# Altium PCB DL-5新款球锁-20201230.PcbDoc (part 2 of 2)
Units mm, origin at the board's own origin, x right, y up, seen from the top; angles counter-clockwise.
Board outline 55.99 x 50 mm, 4 copper layers (Top Layer, POWER, GND, Bottom Layer); 97 components, 70 nets, 304 pads, 134 vias.
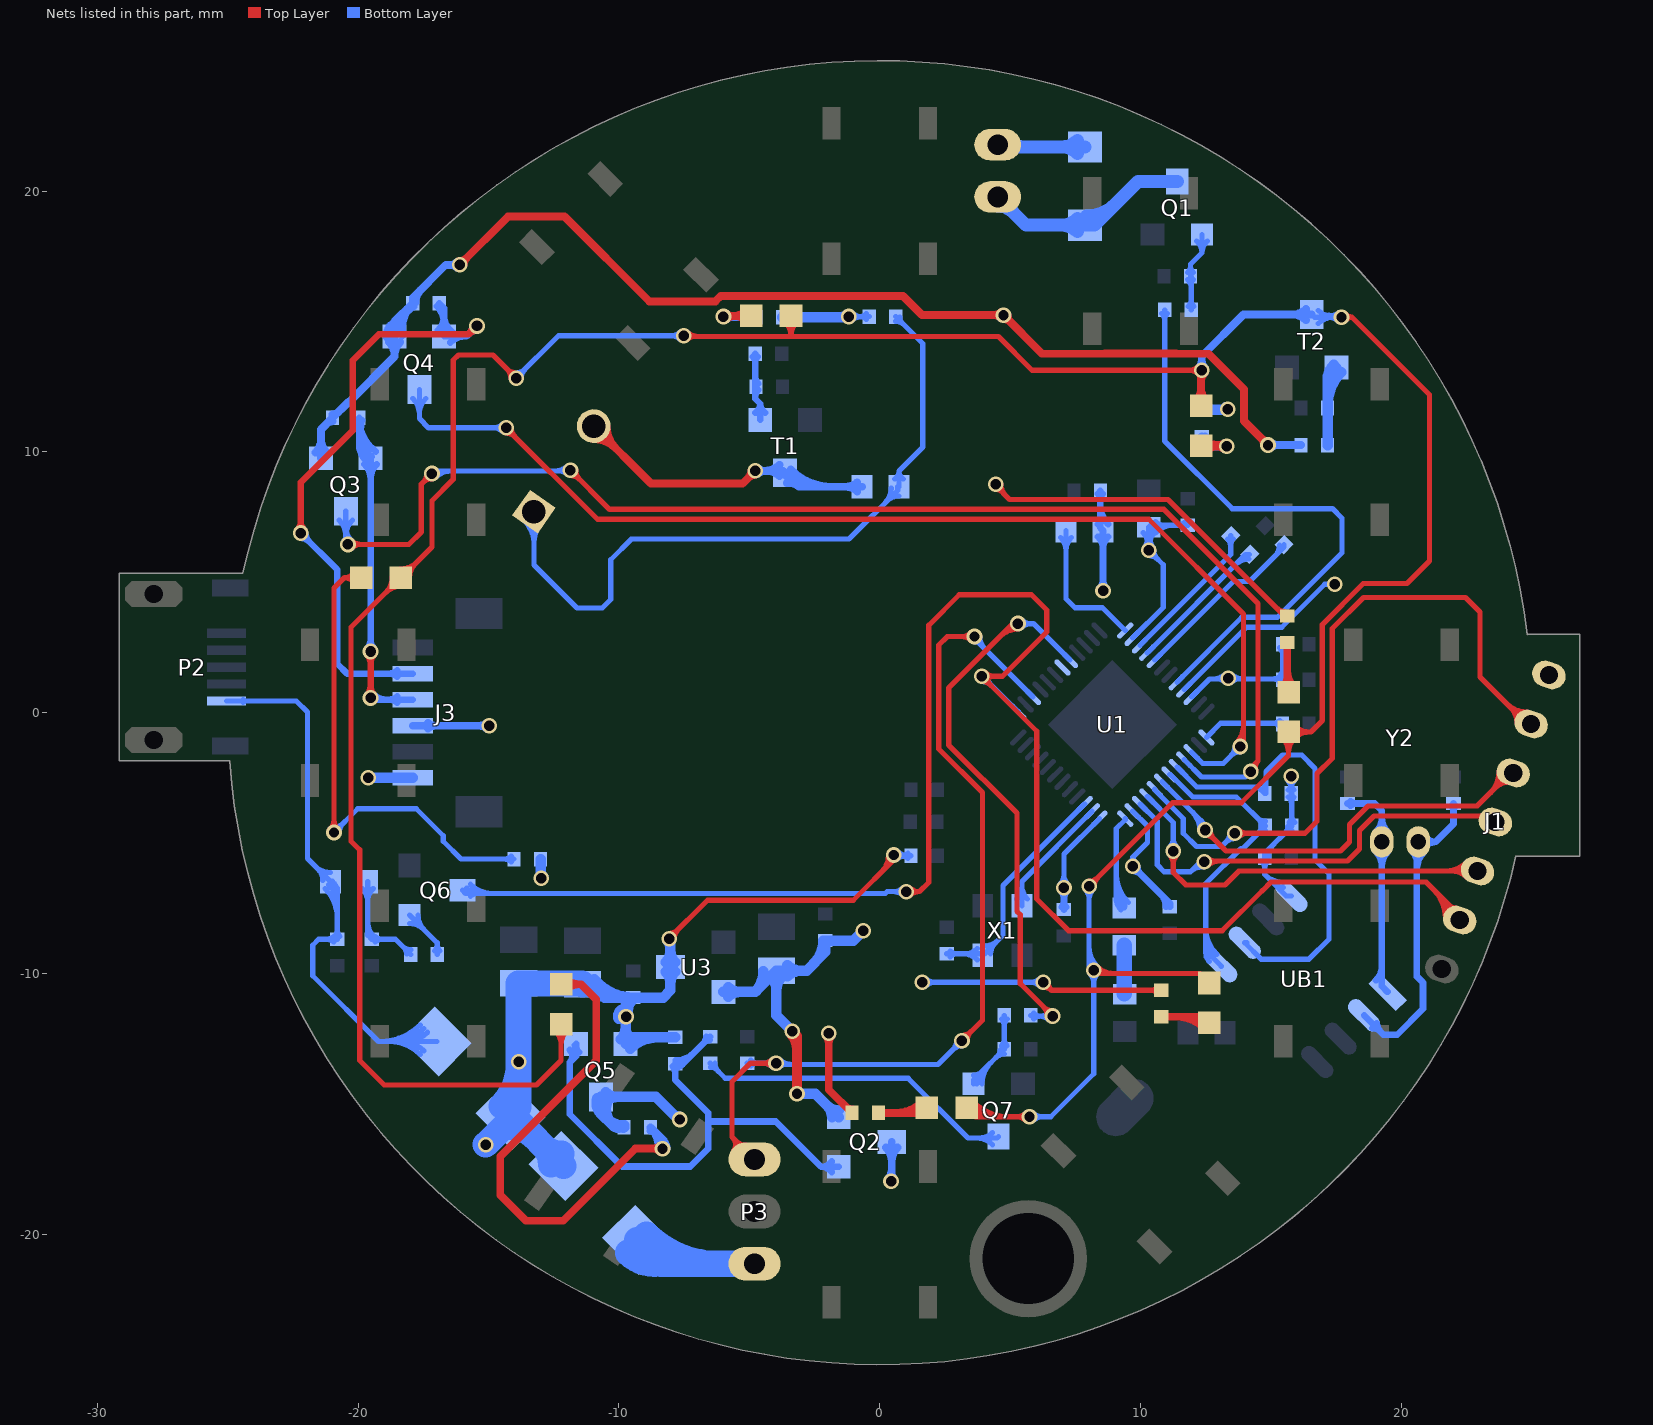
[diagram p4: the nets of this part, all layers, seen from the top]

## Via types
v1: diameter 0.6, hole 0.4, Top Layer to Bottom Layer, 110 vias
v2: diameter 0.6, hole 0.4, Top Layer to Bottom Layer, tented both sides, 12 vias
v3: diameter 0.61, hole 0.406, Top Layer to Bottom Layer, 6 vias
v4: diameter 0.61, hole 0.4, Top Layer to Bottom Layer, 4 vias
v5: diameter 0.61, hole 0.406, Top Layer to Bottom Layer, tented both sides, 2 vias

## Nets (pads, with @x,y where several pads share a name; then routed paths per layer and width w, separated by ;. In a path a pad name is that pad's centre, name@x,y a point inside that pad or via, vN(x,y) a via of type N, cw(c..) or ccw(c..) an arc to the next point about the centre after c; other vN are vias at no path point) (continued)
M3V3: C4.1 C5.1 C39.1 C41.1 C42.1 J1.1 J3.1 Q2.S R5.2 R8.2 U1.26 U3.2 UB1.8 | length 46.4
  Top Layer w0.4: v2@-3.424,-12.288 cw(c-4.023,-12.888) -3.175,-12.888 ; v2(-3.353,-12.217) -3.175,-12.395 v2(-3.175,-14.605)
  Bottom Layer w0.2: J3.1@-18.015,-2.515 J3.1@-18,-2.5 ; U1.26@9.693,2.866 10.866,4.039 10.866,5.67 v1(10.312,6.223) C41.1@10.312,7.112 10.389,7.188 C42.1@11.811,7.188 ; C41.1@10.1,6.9 cw(c9.588,6.388) 10.312,6.388 cw(c11.037,6.388) C41.1@10.525,6.9 ; v1@10.161,6.353 ccw(c9.889,6.586) 10.234,6.679 ; v1@10.171,6.364 ccw(c9.83,6.706) 10.312,6.706 ccw(c10.795,6.706) v1@10.454,6.364 ; v1@10.212,6.396 ccw(c10.044,6.688) 10.37,6.601 ; 10.255,6.601 ccw(c10.581,6.688) v1@10.412,6.396 ; v1@10.312,6.023 cw(c10.312,5.54) 10.654,5.882 cw(c10.995,6.223) v1@10.512,6.223 ; 10.39,6.679 ccw(c10.736,6.586) v1@10.464,6.353 ; C41.1@10.433,7.041 cw(c10.788,6.687) 10.788,7.188 ; C41.1@10.575,6.9 cw(c11.271,6.204) 11.271,7.188 ; C41.1@10.575,7.324 ccw(c10.903,7.652) 10.903,7.188 ; C42.1@11.677,7.079 ccw(c11.414,6.816) 11.414,7.188 ccw(c11.414,7.56) C42.1@11.677,7.297 ; C39.1@14.649,-5.697 cw(c14.386,-5.96) 14.757,-5.96 cw(c15.129,-5.96) C39.1@14.866,-5.697 ; 14.781,-6.221 ccw(c15.472,-5.53) UB1.8@15.472,-6.507 ; C39.1@14.911,-5.537 cw(c15.651,-5.537) 15.128,-5.014 ; 15.122,-6.562 ccw(c15.472,-6.212) UB1.8@15.472,-6.707 ; 15.493,-4.65 cw(c15.799,-4.956) R8.2@15.799,-4.523 ; R8.2@15.554,-4.588 ccw(c15.334,-4.369) R8.2@15.645,-4.369 ; v1@15.632,-2.58 cw(c15.291,-2.921) 15.773,-2.921 cw(c16.256,-2.921) v1@15.915,-2.58 ; R5.2@15.665,-3.233 cw(c15.34,-3.557) 15.799,-3.557 ; R5.2@15.665,-2.965 ccw(c15.402,-2.702) 15.773,-2.702 ccw(c16.145,-2.702) R5.2@15.882,-2.965 ; v1@15.673,-2.612 cw(c15.548,-2.828) 15.79,-2.764 ; v1@15.684,-2.617 cw(c15.623,-2.738) 15.754,-2.774 ; R8.2@15.69,-4.209 ccw(c15.427,-3.946) 15.799,-3.946 ccw(c16.171,-3.946) R8.2@15.908,-4.209 ; 15.757,-2.764 cw(c15.999,-2.828) v1@15.873,-2.612 ; v1(15.773,-2.438) R5.2@15.773,-3.099 15.799,-3.124 R8.2@15.799,-4.343 14.757,-5.385 C39.1@14.757,-5.563 14.757,-6.198 15.585,-7.025 UB1.8@15.79,-7.025 ; 15.793,-2.774 cw(c15.924,-2.738) v1@15.863,-2.617 ; 15.799,-3.435 cw(c16.084,-3.435) R5.2@15.882,-3.233
  Bottom Layer w0.4: v2(-19.609,-2.5) J3.1@-17.899,-2.5 ; U3.2@-5.994,-10.704 -4.774,-10.704 ; U3.2@-5.813,-10.885 cw(c-5.373,-11.325) -5.373,-10.704 cw(c-5.373,-10.083) U3.2@-5.813,-10.522 ; C4.1@-4.473,-9.91 cw(c-5.505,-9.972) -4.774,-10.704 ; C4.1@-4.18,-10.11 cw(c-4.706,-10.636) -3.962,-10.636 cw(c-3.219,-10.636) C4.1@-3.745,-10.11 ; C4.1@-3.541,-10.11 cw(c-3.016,-10.636) -3.016,-9.892 cw(c-3.016,-9.148) C4.1@-3.541,-9.674 ; v2(-3.353,-12.217) -3.962,-11.608 C4.1@-3.962,-9.892 ; v2(-3.175,-14.605) -2.479,-14.605 Q2.S@-1.575,-15.509 ; -2.524,-9.61 ccw(c-3.396,-8.738) C5.1@-2.162,-8.738 ; Q2.S@-1.832,-15.509 ccw(c-2.453,-15.509) -2.014,-15.07 ccw(c-1.575,-14.631) Q2.S@-1.575,-15.252 ; v1(-0.635,-8.357) -1.016,-8.738 C5.1@-2.083,-8.738 -2.083,-9.169 -2.805,-9.892 C4.1@-3.962,-9.892 ; -4.774,-10.704 C4.1@-3.962,-9.892
NetBZ1_1: BZ1.1 C7.2 R47.1 | length 32.4
  Bottom Layer w0.2: BZ1.1@-13.617,7.355 cw(c-14.47,6.502) -13.263,6.502 cw(c-12.056,6.502) BZ1.1@-12.909,7.355 ; BZ1.1@-13.475,7.497 cw(c-13.987,6.985) -13.263,6.985 cw(c-12.539,6.985) BZ1.1@-13.051,7.497 ; BZ1.1@-13.263,7.709 -13.263,5.668 -11.608,4.013 -10.643,4.013 -10.312,4.343 -10.312,5.867 -9.525,6.655 -1.185,6.655 0.686,8.526 C7.2@0.686,8.661 ; 0.2,8.039 ccw(c-0.372,8.611) C7.2@0.437,8.611 ; 0.284,8.124 cw(c0.737,7.672) C7.2@0.737,8.311 ; C7.2@0.571,8.961 ccw(c0.365,9.271) 0.737,9.271 ; R47.1@0.61,15.01 cw(c0.61,14.577) 0.916,14.883 ; R47.1@0.61,15.189 1.651,14.148 1.651,10.185 0.737,9.271 ; C7.2@0.737,8.661 0.737,9.271 ; R47.1@0.764,15.164 ccw(c1.074,15.164) R47.1@0.855,14.944 ; C7.2@0.903,8.961 cw(c1.108,9.271) 0.737,9.271
NetBZ1_2: BZ1.2 C7.1 T1.3 | length 20.7
  Top Layer w0.3: BZ1.2@-10.969,10.486 cw(c-10.969,9.278) -10.115,10.132 cw(c-9.262,10.986) BZ1.2@-10.469,10.986 ; BZ1.2@-10.969,10.986 -8.772,8.788 -5.258,8.788 v1(-4.775,9.271) ; v1@-4.925,9.271 cw(c-5.287,9.271) -5.031,9.015 cw(c-4.775,8.759) v1@-4.775,9.121
  Bottom Layer w0.3: v1(-4.775,9.271) -3.708,9.271 T1.3@-3.632,9.195 -3.099,8.661 ; v1@-4.669,9.165 cw(c-4.413,8.909) -4.413,9.271 cw(c-4.413,9.633) v1@-4.669,9.377 ; -4.414,9.271 ccw(c-4.414,10.069) T1.3@-3.849,9.505 ; -4.334,9.271 cw(c-4.334,8.586) T1.3@-3.849,9.07 ; T1.3@-3.627,9.107 ccw(c-2.551,10.183) -2.551,8.661 ; T1.3@-3.569,8.801 cw(c-3.463,8.297) -3.099,8.661 ; T1.3@-3.415,9.319 ccw(c-1.827,10.907) -1.827,8.661 ; T1.3@-3.325,9.102 ccw(c-2.807,9.102) -3.173,8.736 ; C7.1@-0.863,8.485 ccw(c-1.289,8.058) -1.289,8.661 ccw(c-1.289,9.265) C7.1@-0.863,8.838 ; C7.1@-0.686,8.661 -3.099,8.661
NetC1_1: C1.1 U1.37 | length 3.7
  Bottom Layer w0.2: U1.37@12.522,-0.952 13.067,-0.406 C1.1@15.443,-0.406 ; C1.1@15.334,-0.515 ccw(c15.071,-0.778) 15.071,-0.406 ccw(c15.071,-0.035) C1.1@15.334,-0.298
NetC20_2: C20.2 RW2.2 RW3.2 | length 7
  Bottom Layer w0.2: C20.2@-19.846,-6.739 cw(c-20.358,-7.251) -19.634,-7.251 cw(c-18.91,-7.251) C20.2@-19.422,-6.739 ; -19.634,-8.008 ccw(c-18.829,-8.008) RW2.2@-19.398,-8.578 ; C20.2@-19.634,-6.477 -19.634,-8.534 RW2.2@-19.482,-8.687 -18.567,-8.687 RW3.2@-17.983,-9.271 ; RW2.2@-19.348,-8.796 cw(c-19.085,-9.059) -19.085,-8.687 cw(c-19.085,-8.315) RW2.2@-19.348,-8.578 ; -18.289,-8.965 ccw(c-17.983,-8.658) RW3.2@-17.983,-9.092 ; RW3.2@-18.228,-9.026 cw(c-18.448,-9.246) RW3.2@-18.137,-9.246
NetC30_1: C30.1 L2.1 | length 1.9
  Bottom Layer w0.6: C30.1@9.373,-10.77 L2.1@9.373,-8.915
NetC34_1: C34.1 U1.29 | length 7.3
  Bottom Layer w0.2: U1.29@10.542,2.018 13.553,5.029 14.173,5.029 15.498,6.354 C34.1@15.498,6.448 ; 15.15,6.006 ccw(c14.726,6.43) C34.1@15.326,6.43
NetC37_1: C37.1 U1.28 | length 6.1
  Bottom Layer w0.2: U1.28@10.259,2.301 14.025,6.067 C37.1@14.177,6.067 ; 13.637,5.679 cw(c14.159,5.158) C37.1@14.159,5.895
NetC37_2: C37.2 U1.27 | length 6.2
  Bottom Layer w0.2: U1.27@9.976,2.583 13.458,6.066 C37.2@13.458,6.785 ; C37.2@13.332,6.659 cw(c13.025,6.352) 13.458,6.352 ; C37.2@13.458,6.439 cw(c13.769,6.439) C37.2@13.549,6.659
NetC38_2: C38.2 U1.3 X1.3 | length 11.6
  Bottom Layer w0.2: C38.2@2.565,-9.246 4.01,-9.246 4.724,-8.531 4.724,-6.628 U1.3@7.855,-3.498 ; C38.2@2.7,-9.354 cw(c2.963,-9.617) 2.963,-9.246 cw(c2.963,-8.874) C38.2@2.7,-9.137 ; 3.198,-9.246 cw(c3.198,-10.007) X1.3@3.737,-9.469 ; 3.251,-9.246 ccw(c3.251,-8.559) X1.3@3.737,-9.044 ; X1.3@3.949,-8.957 ccw(c3.949,-8.112) 4.546,-8.709 ; X1.3@4.249,-9.257 cw(c4.853,-9.257) 4.426,-8.83
NetC43_1: C43.1 UB1.1 Y2.2 | length 12
  Bottom Layer w0.254: C43.1@17.932,-3.48 18.974,-3.48 19.25,-3.756 Y2.2@19.25,-4.953 19.25,-10.485 UB1.1@19.467,-10.702 ; C43.1@18.048,-3.57 cw(c18.264,-3.786) 18.264,-3.48 cw(c18.264,-3.173) C43.1@18.048,-3.39 ; Y2.2@19.022,-5.331 cw(c18.47,-5.883) 19.25,-5.883 cw(c20.03,-5.883) Y2.2@19.479,-5.331 ; Y2.2@19.022,-4.575 ccw(c18.47,-4.023) 19.25,-4.023 ccw(c20.03,-4.023) Y2.2@19.479,-4.575 ; UB1.1@19.026,-10.262 ccw(c18.486,-9.721) 19.25,-9.721
NetC45_2: C45.2 UB1.2 Y2.1 | length 15.2
  Bottom Layer w0.254: UB1.2@18.569,-11.6 19.313,-12.344 19.837,-12.344 20.828,-11.354 20.828,-10.35 20.593,-10.115 20.593,-5.01 Y2.1@20.65,-4.953 21.311,-4.953 ; UB1.2@18.887,-12.091 cw(c18.887,-12.509) 19.182,-12.214 cw(c19.478,-11.918) UB1.2@19.06,-11.918 ; Y2.1@20.422,-5.331 cw(c20.008,-5.745) 20.593,-5.745 ; 20.593,-6.02 cw(c21.567,-6.02) Y2.1@20.879,-5.331 ; Y2.1@20.905,-5.151 cw(c21.311,-5.467) 21.311,-4.953 ; Y2.1@20.905,-4.755 ccw(c21.311,-4.439) 21.311,-4.953 ; C45.2@21.907,-3.57 cw(c21.69,-3.786) 21.996,-3.786 cw(c22.303,-3.786) C45.2@22.086,-3.57 ; C45.2@21.996,-3.48 21.996,-4.267 21.311,-4.953
NetD1_1: D1.1 P3.1 | length 9
  Bottom Layer w1: D1.1@-9.658,-20.705 ccw(c-8.642,-19.689) -8.642,-21.126 ; D1.1@-9.305,-20.21 -8.389,-21.126 P3.1@-4.801,-21.126 ; D1.1@-8.951,-19.998 ccw(c-6.228,-17.275) -6.228,-21.126
NetD3_1: D3.1 P1.1 Q1.C | length 11.9
  Bottom Layer w0.5: P1.1@4.521,19.427 cw(c4.521,18.582) 5.119,19.18 cw(c5.716,19.777) P1.1@4.871,19.777 ; P1.1@4.521,19.777 5.605,18.693 D3.1@7.874,18.693 8.228,18.693 9.906,20.371 Q1.C@11.405,20.371 ; D3.1@7.577,18.446 ccw(c6.979,17.848) 6.979,18.693 ccw(c6.979,19.538) D3.1@7.577,18.94 ; D3.1@7.924,19.043 ccw(c7.924,20.622) 9.041,19.506
NetL2_2: L2.2 U1.48 | length 6.3
  Bottom Layer w0.2: L2.2@9.068,-7.119 ccw(c9.696,-7.119) L2.2@9.252,-7.564 ; 9.068,-6.636 ccw(c10.179,-6.636) L2.2@9.393,-7.422 ; 9.068,-6.154 ccw(c10.662,-6.154) L2.2@9.535,-7.281 ; L2.2@9.373,-7.493 9.068,-7.188 9.068,-4.445 9.41,-4.102 U1.48@9.41,-4.063
NetL3_1: L3.1 U1.25 | length 6.5
  Bottom Layer w0.2: L3.1@6.925,6.723 cw(c6.413,6.211) 7.137,6.211 cw(c7.862,6.211) L3.1@7.35,6.723 ; L3.1@7.137,6.985 7.137,4.369 7.481,4.025 8.534,4.025 U1.25@9.41,3.149
NetLED2_1: LED2.1 R12.2 | length 5
  Top Layer w0.3: LED2.1@12.319,10.236 12.344,10.211 v1(13.31,10.211) ; LED2.1@12.518,10.037 cw(c12.938,9.617) 12.938,10.211 ; LED2.1@12.518,10.435 ccw(c13.061,10.978) v1@13.061,10.211 ; 12.793,10.283 ccw(c12.944,10.845) v1@13.235,10.341 ; v1@13.204,10.105 ccw(c12.947,9.849) 12.947,10.211 ccw(c12.947,10.573) v1@13.204,10.317
  Bottom Layer w0.3: R12.2@12.344,10.592 12.725,10.211 v1(13.31,10.211) ; R12.2@12.474,10.592 ccw(c12.786,10.592) R12.2@12.565,10.371 ; v1@13.204,10.105 ccw(c12.947,9.849) 12.947,10.211 ccw(c12.947,10.573) v1@13.204,10.317
NetLED2_2: LED2.2 LED3.2 LED4.2 LED6.2 LED7.2 LED8.2 LED9.2 T2.3 | length 155.2
  Top Layer w0.2: LED7.2@-18.696,5.182 cw(c-19.497,5.182) -18.931,4.615 cw(c-18.364,4.049) LED7.2@-18.364,4.85 ; LED7.2@-18.364,5.513 ccw(c-18.364,6.376) -17.754,5.766 ; LED7.2@-18.032,5.182 cw(c-17.293,5.182) -17.816,5.705 ; v1@-14.145,12.827 ccw(c-14.627,12.827) -14.286,13.168 ccw(c-13.945,13.51) v1@-13.945,13.027 ; v1(-13.945,12.827) -14.835,13.717 -16.154,13.717 -16.358,13.514 -16.358,8.941 -17.17,8.128 -17.17,6.35 -18.339,5.182 LED7.2@-18.364,5.182 -20.269,3.277 -20.269,-4.928 -19.939,-5.258 -19.939,-13.335 -18.999,-14.275 -13.157,-14.275 -12.217,-13.335 LED6.2@-12.217,-11.938 ; LED6.2@-12.452,-12.173 cw(c-13.018,-12.739) -12.217,-12.739 cw(c-11.416,-12.739) LED6.2@-11.983,-12.173 ; v1(-7.518,14.453) -7.544,14.453 -7.518,14.427 -3.378,14.427 ; v1@-7.377,14.311 cw(c-7.097,14.031) -7.097,14.427 ; v1@-7.377,14.594 ccw(c-6.974,14.997) -6.974,14.427 ; LED8.2@-3.63,14.972 cw(c-4.113,14.453) -3.404,14.453 ; LED8.2@-3.404,15.215 -3.404,14.453 ; LED8.2@-3.178,14.972 ccw(c-2.695,14.453) -3.404,14.453 ; LED9.2@3.279,-15.187 ccw(c4.021,-14.445) 4.021,-15.494 ; LED9.2@3.327,-15.138 3.683,-15.494 v2(5.74,-15.494) ; LED9.2@3.378,-14.834 LED9.2@3.505,-14.961 ; LED9.2@3.421,-15.045 ccw(c4.504,-13.962) 4.504,-15.494 ; LED9.2@3.562,-14.904 ccw(c4.987,-13.479) 4.987,-15.494 ; v2@5.599,-15.635 ccw(c5.258,-15.977) 5.258,-15.494 ccw(c5.258,-15.011) v2@5.599,-15.353 ; v1(8.026,-6.655) 11.227,-3.454 13.857,-3.454 15.672,-1.64 LED3.2@15.672,-0.737 16.535,-0.737 16.968,-0.304 16.968,3.383 18.538,4.953 20.218,4.953 21.082,5.817 21.082,12.192 18.11,15.164 ; v1@8.026,-6.455 ccw(c8.026,-5.972) 8.368,-6.313 ccw(c8.709,-6.655) v1@8.226,-6.655 ; v1@8.346,-9.739 ccw(c8.984,-9.101) 8.984,-10.003 ; 8.501,-10.003 cw(c8.501,-9.584) v1(8.204,-9.881) 8.327,-10.003 12.264,-10.003 LED4.2@12.624,-10.363 ; v1@12.203,12.99 ccw(c11.862,12.649) 11.862,13.132 ccw(c11.862,13.615) v1@12.203,13.273 ; v1(12.344,13.132) 5.842,13.132 4.547,14.427 -3.378,14.427 ; LED3.2@15.437,-0.971 cw(c14.871,-1.538) 15.672,-1.538 cw(c16.473,-1.538) 15.906,-0.971 cw(c16.473,-1.538) 16.473,-0.737 cw(c16.473,0.064) LED3.2@15.906,-0.502 ; v1(17.704,15.164) 18.11,15.164 ; v1@17.862,15.042 cw(c18.11,14.851) 18.11,15.164 ; v1@17.862,15.286 ccw(c18.11,15.477) 18.11,15.164 ; -3.404,14.453 -3.378,14.427
  Top Layer w0.3: LED2.2@12.12,11.959 ccw(c11.639,12.441) 12.319,12.441 ccw(c12.999,12.441) LED2.2@12.518,11.959 ; v1@12.238,13.026 cw(c12.044,12.831) 12.319,12.831 ; LED2.2@12.319,11.76 12.319,13.106 v1(12.344,13.132) ; 12.319,12.708 cw(c12.768,12.708) v1@12.45,13.026
  Bottom Layer w0.2: v1(-13.945,12.827) -12.319,14.453 v1(-7.518,14.453) ; v1@-13.945,13.027 ccw(c-13.945,13.51) -13.603,13.168 ccw(c-13.262,12.827) v1@-13.745,12.827 ; v1@-7.66,14.311 ccw(c-8.001,13.97) -8.001,14.453 ccw(c-8.001,14.935) v1@-7.66,14.594 ; v2(5.74,-15.494) 6.553,-15.494 8.204,-13.843 v1(8.204,-9.881) ; v2@5.882,-15.635 cw(c6.223,-15.977) 6.223,-15.494 cw(c6.223,-15.011) v2@5.882,-15.353 ; v1@7.885,-6.796 cw(c7.544,-7.138) 8.026,-7.138 cw(c8.509,-7.138) v1@8.168,-6.796 ; 8.026,-9.451 ccw(c8.633,-9.451) v1(8.204,-9.881) ; 8.026,-8.969 ccw(c9.116,-8.969) v1@8.346,-9.739 ; v1(8.026,-6.655) 8.026,-9.703 v1(8.204,-9.881) ; v1@8.063,-10.022 cw(c7.721,-10.363) 8.204,-10.363 cw(c8.687,-10.363) v1@8.346,-10.022 ; T2.3@16.561,15.265 16.662,15.164 v1(17.704,15.164) ; T2.3@16.813,14.92 cw(c17.402,14.331) 17.402,15.164 ; T2.3@16.813,15.425 ccw(c17.444,16.056) v1@17.444,15.164 ; 17.111,15.253 ccw(c17.266,15.832) v1@17.594,15.331 ; 17.377,15.182 cw(c17.311,14.937) v1@17.531,15.064 ; v1@17.562,15.022 ccw(c17.221,14.681) 17.221,15.164 ccw(c17.221,15.647) v1@17.562,15.305
  Bottom Layer w0.3: v1@12.238,13.238 ccw(c11.982,13.494) 12.344,13.494 ccw(c12.707,13.494) v1@12.45,13.238 ; v1(12.344,13.132) 12.344,13.665 13.945,15.265 T2.3@16.561,15.265 ; T2.3@16.344,15.048 ccw(c15.819,14.524) 15.819,15.265 ccw(c15.819,16.007) T2.3@16.344,15.483
NetLED3_1: LED3.1 R13.2 | length 3
  Top Layer w0.3: LED3.1@15.473,0.987 ccw(c15.114,1.345) 15.621,1.345 ; 15.621,1.59 ccw(c16.475,1.59) LED3.1@15.871,0.987 ; R13.2@15.621,2.692 15.621,0.838 LED3.1@15.672,0.787
NetLED4_1: LED4.1 R14.2 | length 3.6
  Top Layer w0.3: R14.2@10.795,-11.659 12.395,-11.659 LED4.1@12.624,-11.887 ; 11.392,-11.659 cw(c11.392,-13.119) LED4.1@12.425,-12.086 ; 12.116,-11.659 cw(c12.116,-12.395) LED4.1@12.637,-11.874
NetLED6_1: LED6.1 R15.2 | length 22.2
  Top Layer w0.3: LED6.1@-12.217,-10.414 -11.455,-10.414 -10.871,-10.998 -10.871,-13.335 -14.554,-17.018 -14.554,-18.491 -13.564,-19.482 -12.141,-19.482 -9.373,-16.713 v1(-8.331,-16.713) ; LED6.1@-12.018,-10.613 cw(c-11.537,-11.094) -11.537,-10.414 cw(c-11.537,-9.734) LED6.1@-12.018,-10.215 ; v1@-8.437,-16.819 ccw(c-8.693,-17.075) -8.693,-16.713 ccw(c-8.693,-16.351) v1@-8.437,-16.607
  Bottom Layer w0.3: R15.2@-8.788,-16.03 cw(c-8.788,-16.342) R15.2@-8.568,-16.121 ; v1@-8.481,-16.705 ccw(c-9.534,-16.646) R15.2@-8.788,-15.9 -8.306,-16.383 ; -8.314,-16.375 cw(c-8.635,-16.696) v1@-8.181,-16.722
NetLED7_1: LED7.1 R16.2 | length 21.7
  Top Layer w0.2: v2@-21.067,-4.452 ccw(c-21.408,-4.11) -20.925,-4.11 ccw(c-20.443,-4.11) v2@-20.784,-4.452 ; v2(-20.925,-4.593) -20.925,4.775 -20.519,5.182 ; LED7.1@-20.162,4.994 ccw(c-20.519,4.748) -20.519,5.182 ; LED7.1@-20.162,5.37 cw(c-20.519,5.615) -20.519,5.182 ; LED7.1@-19.888,5.182 -20.519,5.182
  Bottom Layer w0.2: v2(-20.925,-4.593) -20.015,-3.683 -17.773,-3.683 -16.739,-4.717 -16.739,-4.928 -16.053,-5.613 R16.2@-14.021,-5.613 ; v2@-20.925,-4.393 ccw(c-20.925,-3.91) -20.584,-4.252 ccw(c-20.243,-4.593) v2@-20.725,-4.593 ; R16.2@-14.13,-5.722 ccw(c-14.393,-5.985) -14.393,-5.613 ccw(c-14.393,-5.242) R16.2@-14.13,-5.505
NetLED8_1: LED8.1 R17.2 | length 4.5
  Top Layer w0.3: v1(-5.994,15.189) -5.969,15.215 LED8.1@-4.928,15.215 ; v1@-5.888,15.083 cw(c-5.571,14.766) -5.571,15.215 ; v1@-5.888,15.295 ccw(c-5.694,15.49) -5.694,15.215 ; LED8.1@-5.127,15.015 ccw(c-5.608,14.534) -5.608,15.215 ccw(c-5.608,15.895) LED8.1@-5.127,15.414
  Bottom Layer w0.3: v1(-5.994,15.189) -5.969,15.164 R17.2@-4.75,15.164 ; v1@-5.888,15.083 cw(c-5.694,14.888) -5.694,15.164 ; v1@-5.888,15.295 ccw(c-5.571,15.613) -5.571,15.164
NetLED9_1: LED9.1 R20.2 | length 3.7
  Top Layer w0.2: LED9.1@1.753,-14.935 LED9.1@1.854,-14.834
  Top Layer w0.3: R20.2@-0.051,-15.342 1.6,-15.342 LED9.1@1.803,-15.138 ; 0.633,-15.342 ccw(c0.633,-13.968) LED9.1@1.604,-14.939 ; 1.357,-15.342 ccw(c1.357,-14.692) LED9.1@1.816,-15.151
NetQ1_B: Q1.B R1.1 R7.1 | length 5.9
  Bottom Layer w0.2: R1.1@11.804,16.604 cw(c11.48,16.28) 11.938,16.28 ; R1.1@11.804,16.873 ccw(c11.541,17.136) 11.913,17.136 ccw(c12.284,17.136) R1.1@12.022,16.873 ; R7.1@11.829,15.578 ccw(c11.566,15.84) 11.938,15.84 ccw(c12.31,15.84) R7.1@12.047,15.578 ; R7.1@11.938,15.443 11.938,16.713 R1.1@11.913,16.739 11.913,17.196 12.355,17.638 ; 11.938,16.403 cw(c12.223,16.403) R1.1@12.022,16.604 ; Q1.B@12.145,18.091 cw(c11.761,17.638) 12.355,17.638 ; Q1.B@12.355,18.339 12.355,17.638 ; Q1.B@12.565,18.091 ccw(c12.948,17.638) 12.355,17.638
NetQ2_G: Q2.G Q5.G R2.2 R3.1 | length 25.4
  Bottom Layer w0.254: Q5.G@-11.882,-12.928 cw(c-12.131,-13.167) -11.887,-13.411 ; Q5.G@-11.754,-13.011 cw(c-11.809,-13.167) -11.643,-13.167 ; -11.704,-13.228 ccw(c-11.944,-12.988) Q5.G@-11.698,-12.753 ; Q5.G@-11.643,-12.7 -11.643,-13.167 ; Q5.G@-11.533,-13.011 ccw(c-11.478,-13.167) -11.643,-13.167 ; R2.2@-7.938,-13.552 cw(c-8.155,-13.769) -7.849,-13.769 cw(c-7.542,-13.769) R2.2@-7.759,-13.552 ; R2.2@-7.823,-13.589 ccw(c-7.823,-13.221) -7.563,-13.481 ; R2.2@-7.823,-13.335 ccw(c-7.823,-12.354) -7.129,-13.048 ; R2.2@-7.728,-13.546 cw(c-7.544,-13.706) -7.544,-13.462 ; R2.2@-7.728,-13.378 ccw(c-7.544,-13.218) -7.544,-13.462 ; -6.763,-12.681 ccw(c-7.023,-12.421) R3.1@-6.655,-12.421 ; R3.1@-6.701,-12.619 cw(c-6.528,-12.793) R3.1@-6.528,-12.548 ; R3.1@-6.502,-12.421 -7.544,-13.462 ; Q2.G@-1.835,-17.612 ccw(c-2.25,-17.935) -2.25,-17.409 ; Q2.G@-1.835,-17.206 cw(c-2.25,-16.883) -2.25,-17.409 ; Q2.G@-1.575,-17.409 -2.25,-17.409 ; -11.887,-13.411 -11.643,-13.167 ; -11.887,-13.411 -11.887,-15.392 -9.881,-17.399 -7.264,-17.399 -6.579,-16.713 -6.579,-15.672 ; -7.544,-13.462 R2.2@-7.849,-13.462 -7.849,-14.072 -6.579,-15.342 -6.579,-15.672 ; -6.579,-15.672 -3.988,-15.672 -2.25,-17.409
NetQ6_B: Q6.B RW3.1 | length 3.8
  Bottom Layer w0.2: Q6.B@-18.034,-8.082 cw(c-18.034,-8.867) -17.479,-8.312 cw(c-16.924,-7.757) Q6.B@-17.709,-7.757 ; Q6.B@-18.034,-7.757 -16.967,-8.824 RW3.1@-16.967,-9.271 ; RW3.1@-17.076,-9.137 ccw(c-17.339,-8.874) -16.967,-8.874 ccw(c-16.595,-8.874) RW3.1@-16.858,-9.137
NetQ7_B: Q7.B R6.1 R26.1 | length 6.6
  Bottom Layer w0.203: Q7.B@3.597,-14.224 3.597,-14.081 R26.1@4.773,-12.905 4.775,-12.902 R6.1@4.775,-11.608 ; Q7.B@3.597,-13.901 ccw(c3.597,-13.465) 3.904,-13.773 ; Q7.B@3.717,-14.224 cw(c4.353,-14.224) 3.903,-13.774 ; Q7.B@3.92,-14.224 cw(c5.046,-14.224) 4.25,-13.428 ; 4.469,-13.208 cw(c4.773,-13.512) R26.1@4.773,-13.083 ; R26.1@4.53,-13.147 ccw(c4.314,-12.93) R26.1@4.62,-12.93 ; R26.1@4.665,-12.772 ccw(c4.399,-12.505) 4.775,-12.505 ; R6.1@4.667,-11.741 cw(c4.407,-12.001) 4.775,-12.001 cw(c5.143,-12.001) R6.1@4.883,-11.741 ; 4.775,-12.518 ccw(c5.134,-12.518) R26.1@4.88,-12.772
NetQ7_C: Q7.C R3.2 | length 14.1
  Bottom Layer w0.2: R3.2@-6.502,-13.437 -5.922,-14.017 1.088,-14.017 3.378,-16.307 4.496,-16.307 Q7.C@4.547,-16.256 ; R3.2@-6.477,-13.591 cw(c-6.477,-13.901) R3.2@-6.257,-13.682 ; R3.2@-6.323,-13.437 ccw(c-5.89,-13.437) -6.196,-13.743 ; 3.704,-16.307 cw(c3.704,-17.174) Q7.C@4.317,-16.561 ; 3.82,-16.307 ccw(c3.82,-15.605) Q7.C@4.317,-16.101
NetR4_1: R4.1 R11.1 T1.1 | length 4.5
  Bottom Layer w0.254: R11.1@-4.865,13.652 cw(c-5.082,13.435) -4.775,13.435 cw(c-4.469,13.435) R11.1@-4.685,13.652 ; -4.775,12.103 cw(c-4.382,12.103) R4.1@-4.66,12.382 ; -4.775,12.89 ccw(c-4.382,12.89) R4.1@-4.66,12.612 ; R11.1@-4.775,13.767 -4.775,12.497 -4.775,12.04 -4.582,11.847 ; T1.1@-4.766,11.501 ccw(c-4.999,11.847) -4.582,11.847 ; T1.1@-4.582,11.227 -4.582,11.847 ; T1.1@-4.398,11.501 cw(c-4.166,11.847) -4.582,11.847
NetR53_2: R53.2 R54.2 T2.1 | length 5.2
  Bottom Layer w0.4: R53.2@17.17,10.262 R54.2@17.17,11.684 17.17,12.893 T2.1@17.511,13.233 ; R54.2@17.17,11.791 cw(c18.954,11.791) T2.1@17.693,13.052 ; 17.17,12.756 cw(c17.988,12.756) T2.1@17.41,13.334
NetU1_2: U1.2 X1.1 | length 5.9
  Bottom Layer w0.2: X1.1@5.237,-7.144 ccw(c4.725,-6.632) 5.449,-6.632 ccw(c6.173,-6.632) X1.1@5.661,-7.144 ; X1.1@5.449,-7.407 5.449,-6.469 U1.2@8.138,-3.781
P04/SCK: J1.3 U1.43 | length 20.3
  Top Layer w0.2: v3@12.471,-4.701 cw(c12.471,-5.195) 12.821,-4.845 cw(c13.171,-4.496) v3@12.676,-4.496 ; v3(12.471,-4.496) 13.28,-5.304 17.661,-5.304 18.014,-4.952 18.014,-4.287 18.72,-3.581 22.903,-3.581 24.174,-2.311 J1.3@24.286,-2.311 ; 23.405,-3.079 ccw(c22.586,-2.26) J1.3@23.745,-2.26 ; 23.599,-2.886 cw(c24.145,-3.432) J1.3@24.145,-2.66 ; 23.747,-2.738 ccw(c23.269,-2.26) J1.3@23.945,-2.26
  Bottom Layer w0.2: U1.43@10.825,-2.649 12.471,-4.296 v3(12.471,-4.496) ; 11.981,-3.805 cw(c11.29,-4.496) v3@12.267,-4.496 ; 12.322,-4.147 cw(c11.973,-4.496) v3@12.467,-4.496
P05/MOSI: J1.2 U1.44 | length 30.6
  Top Layer w0.2: v1(13.614,-4.623) 16.303,-4.623 16.764,-4.162 16.764,-2.337 17.348,-1.753 17.348,3.226 18.542,4.42 22.458,4.42 23.012,3.865 23.012,1.372 24.816,-0.432 J1.2@24.97,-0.432 ; v1@13.756,-4.764 cw(c14.097,-5.106) 14.097,-4.623 cw(c14.097,-4.14) v1@13.756,-4.481 ; 24.036,0.348 ccw(c24.829,1.142) J1.2@24.829,0.02 ; 24.192,0.192 cw(c23.62,-0.38) J1.2@24.429,-0.38 ; 24.377,0.007 ccw(c24.829,0.459) J1.2@24.829,-0.18
  Bottom Layer w0.2: U1.44@10.542,-2.932 10.542,-2.96 11.632,-4.051 11.632,-4.622 12.141,-5.131 13.106,-5.131 v1(13.614,-4.623) ; v1@13.414,-4.623 cw(c12.932,-4.623) 13.273,-4.964 cw(c13.614,-5.306) v1@13.614,-4.823
P06/MISO: J1.5 U1.45 | length 19
  Top Layer w0.2: v3@11.107,-5.453 cw(c10.758,-5.803) 11.252,-5.803 cw(c11.747,-5.803) v3@11.397,-5.453 ; v3(11.252,-5.309) 11.252,-6.121 11.735,-6.604 13.232,-6.604 13.767,-6.07 J1.5@22.918,-6.07 ; 21.687,-6.07 ccw(c21.687,-4.929) J1.5@22.494,-5.736 ; 21.935,-6.07 cw(c21.935,-6.86) J1.5@22.494,-6.301 ; 22.17,-6.07 ccw(c22.17,-5.412) J1.5@22.635,-5.877
  Bottom Layer w0.2: U1.45@10.259,-3.215 11.252,-4.208 v3(11.252,-5.309) ; v3@11.107,-5.164 ccw(c10.758,-4.814) 11.252,-4.814 ccw(c11.747,-4.814) v3@11.397,-5.164
P07/NSS: J1.4 U1.46 | length 18.4
  Top Layer w0.2: v1(12.446,-5.715) 12.471,-5.69 17.932,-5.69 18.394,-5.228 18.394,-4.517 18.948,-3.962 23.374,-3.962 J1.4@23.602,-4.19 ; v1@12.587,-5.856 cw(c12.99,-6.259) 12.99,-5.69 ; v1@12.587,-5.574 ccw(c12.868,-5.293) 12.868,-5.69
  Bottom Layer w0.2: U1.46@9.976,-3.498 10.642,-4.163 10.642,-5.841 10.897,-6.096 11.913,-6.096 ; v1@12.425,-5.914 ccw(c12.36,-6.544) 11.913,-6.096 ; v1(12.446,-5.715) 12.395,-5.664 12.344,-5.664 11.913,-6.096
PWR_CTL: R6.2 U1.20 | length 25.3
  Top Layer w0.2: 4.628,2.933 cw(c5.294,2.267) v3@5.294,3.209 ; 4.969,3.275 cw(c5.294,2.95) v3@5.294,3.409 ; v3(5.294,3.414) 5.108,3.414 2.641,0.946 2.641,-1.232 5.26,-3.851 5.26,-7.624 5.385,-7.749 5.385,-10.389 v3(6.629,-11.633) ; v3@6.425,-11.633 ccw(c5.93,-11.633) 6.28,-11.284 ccw(c6.629,-10.934) v3@6.629,-11.428
  Bottom Layer w0.2: v3(5.294,3.414) 5.893,3.414 U1.20@7.289,2.018 ; v3@5.438,3.269 cw(c5.788,2.919) 5.788,3.414 cw(c5.788,3.908) v3@5.438,3.559 ; R6.2@5.791,-11.608 5.817,-11.633 v3(6.629,-11.633) ; R6.2@5.9,-11.742 cw(c6.163,-12.005) 6.163,-11.633 cw(c6.163,-11.261) R6.2@5.9,-11.524 ; v3@6.485,-11.778 ccw(c6.135,-12.128) 6.135,-11.633 ccw(c6.135,-11.139) v3@6.485,-11.488
REMOTO: U1.19
RSTN: J1.6 Q6.C U1.13 | length 75.2
  Top Layer w0.2: v1(1.016,-6.858) 1.525,-6.858 1.881,-6.502 1.881,3.354 3.048,4.521 5.817,4.521 6.401,3.937 6.401,3.099 4.699,1.397 v1(3.912,1.397) 6.02,-0.711 6.02,-7.137 7.239,-8.357 8.001,-8.357 ; v1@1.157,-6.999 cw(c1.499,-7.341) 1.499,-6.858 cw(c1.499,-6.375) v1@1.157,-6.717 ; v1@3.912,1.197 cw(c3.912,0.714) 4.253,1.056 cw(c4.594,1.397) v1@4.112,1.397 ; v1@4.053,1.256 cw(c4.394,0.914) 4.394,1.397 cw(c4.394,1.88) v1@4.053,1.538
  Top Layer w0.203: 8.001,-8.357 13.132,-8.357 14.663,-6.825 14.674,-6.825 15.005,-6.493 20.946,-6.493 22.234,-7.781 J1.6@22.234,-7.949 J1.6@21.792,-7.949 ; 21.23,-6.777 cw(c20.11,-7.898) J1.6@21.694,-7.898 ; 21.577,-7.124 cw(c20.804,-7.898) J1.6@21.898,-7.898 ; 21.853,-7.4 ccw(c22.093,-7.16) J1.6@22.093,-7.499
  Bottom Layer w0.2: Q6.C@-16.002,-6.807 -15.879,-6.93 0.211,-6.93 0.283,-6.858 v1(1.016,-6.858) ; Q6.C@-15.839,-6.719 ccw(c-15.329,-6.209) -15.329,-6.93 ; Q6.C@-15.697,-7.037 cw(c-15.439,-7.295) -15.439,-6.93 ; Q6.C@-15.697,-6.577 ccw(c-14.846,-5.726) -14.846,-6.93 ; v1@0.875,-6.999 ccw(c0.533,-7.341) 0.533,-6.858 ccw(c0.533,-6.375) v1@0.875,-6.717 ; v1@3.912,1.197 cw(c3.912,0.622) 4.318,1.028 ; v1(3.912,1.397) 3.95,1.397 U1.13@5.309,0.038 ; v1@4.112,1.397 ccw(c4.502,1.397) 4.226,1.121
RX2/MOTO0: R7.2 U1.32 | length 23.4
  Bottom Layer w0.2: R7.2@10.813,15.309 cw(c10.55,15.046) 10.922,15.046 cw(c11.294,15.046) R7.2@11.031,15.309 ; R7.2@10.922,15.443 10.922,10.414 13.512,7.824 17.355,7.824 17.725,7.454 17.725,6.131 15.252,3.659 13.88,3.659 U1.32@11.39,1.169
SCL: R5.1 U1.41 UB1.6 | length 18.1
  Bottom Layer w0.2: U1.41@11.39,-2.084 12.155,-2.848 14.506,-2.848 R5.1@14.757,-3.099 ; UB1.6@14.079,-8.821 UB1.6@13.994,-8.821 14.621,-9.449 16.459,-9.449 17.221,-8.687 17.221,-6.172 16.688,-5.639 16.688,-2.134 16.18,-1.626 15.443,-1.626 14.809,-2.26 14.809,-3.047 R5.1@14.757,-3.099 ; R5.1@14.649,-2.965 ccw(c14.262,-2.578) 14.809,-2.578 ; R5.1@14.808,-3.099 R5.1@14.757,-3.099
SDA: R8.1 U1.42 UB1.5 | length 14.5
  Bottom Layer w0.2: U1.42@11.107,-2.366 11.136,-2.366 11.997,-3.228 13.667,-3.228 R8.1@14.783,-4.343 13.923,-5.203 13.847,-5.203 12.497,-6.553 12.497,-9.12 UB1.5@13.096,-9.719 ; 12.497,-9.206 ccw(c12.973,-9.206) UB1.5@12.636,-9.543 ; 12.497,-8.723 ccw(c13.456,-8.723) UB1.5@12.778,-9.401 ; 12.497,-8.24 ccw(c13.939,-8.24) UB1.5@12.919,-9.26 ; 14.477,-4.65 cw(c14.783,-4.956) R8.1@14.783,-4.523 ; 14.477,-4.037 ccw(c14.783,-3.731) R8.1@14.783,-4.164 ; R8.1@14.538,-4.588 ccw(c14.318,-4.369) R8.1@14.629,-4.369 ; R8.1@14.538,-4.098 cw(c14.318,-4.318) R8.1@14.629,-4.318
SETKEY: C40.1 P3.3 U1.15 | length 42.3
  Top Layer w0.2: P3.3@-5.609,-16.822 ccw(c-5.978,-16.576) -5.664,-16.263 ; P3.3@-5.442,-16.932 ccw(c-5.77,-16.714) -5.491,-16.435 ccw(c-5.151,-16.093) P3.3@-5.151,-16.576 ; P3.3@-4.801,-17.126 -5.664,-16.263 ; v1@-4.118,-13.578 ccw(c-4.459,-13.919) -4.459,-13.437 ccw(c-4.459,-12.954) v1@-4.118,-13.295 ; v1(-3.976,-13.437) -4.953,-13.437 -5.664,-14.148 -5.664,-16.263 ; v1(3.15,-12.573) 3.933,-11.79 3.933,-3.062 2.261,-1.39 2.261,2.591 2.591,2.921 v1(3.632,2.921) ; v1@3.15,-12.373 ccw(c3.15,-11.89) 3.491,-12.232 ccw(c3.832,-12.573) v1@3.35,-12.573 ; v1@3.491,2.78 ccw(c3.149,2.438) 3.149,2.921 ccw(c3.149,3.404) v1@3.491,3.062
  Bottom Layer w0.2: C40.1@-5.08,-13.437 v1(-3.976,-13.437) -3.926,-13.487 2.235,-13.487 v1(3.15,-12.573) ; C40.1@-4.946,-13.545 cw(c-4.683,-13.808) -4.683,-13.437 cw(c-4.683,-13.065) C40.1@-4.946,-13.328 ; v1@-4.118,-13.578 ccw(c-4.459,-13.919) -4.459,-13.437 ccw(c-4.459,-12.954) v1@-4.118,-13.295 ; v1@-3.835,-13.578 cw(c-3.616,-13.797) -3.616,-13.487 ; v1@-3.835,-13.295 ccw(c-3.371,-12.831) -3.371,-13.487 ; v1@2.95,-12.573 cw(c2.467,-12.573) 2.808,-12.914 cw(c3.15,-13.256) v1@3.15,-12.773 ; v1@3.632,2.721 cw(c3.632,2.419) 3.846,2.633 ; v1(3.632,2.921) 3.632,2.846 U1.15@5.875,0.603 ; v1@3.832,2.921 ccw(c4.496,2.921) 4.027,2.452
TX2/MOTO1: U1.33 | length 7.5
  Bottom Layer w0.2: U1.33@11.673,0.886 14.065,3.279 15.41,3.279 17.059,4.928 v1(17.45,4.928)
UART_RD: J3.5 Q4.S R44.1 | length 30.8
  Top Layer w0.254: v3@-22.325,7.009 ccw(c-22.629,7.313) -22.2,7.313 ccw(c-21.77,7.313) v3@-22.074,7.009 ; v3(-22.2,6.883) -22.2,8.827 -20.206,10.82 -20.206,13.51 -19.212,14.504 -15.773,14.504 v3(-15.443,14.834) ; v3@-15.621,14.834 cw(c-16.05,14.834) -15.747,14.53 cw(c-15.443,14.227) v3@-15.443,14.656
  Bottom Layer w0.254: v3@-22.2,6.706 cw(c-22.2,6.276) -21.896,6.58 cw(c-21.593,6.883) v3@-22.022,6.883 ; v3(-22.2,6.883) -20.803,5.486 -20.803,1.88 -20.423,1.5 J3.5@-17.899,1.5 ; J3.5@-18.497,1.378 ccw(c-18.792,1.082) -18.792,1.5 ccw(c-18.792,1.918) J3.5@-18.497,1.622 ; R44.1@-16.981,15.582 cw(c-17.651,14.911) -16.703,14.911 ; Q4.S@-16.936,14.661 ccw(c-17.5,15.224) -16.703,15.224 ccw(c-15.906,15.224) -16.47,14.661 ccw(c-15.906,15.224) -15.906,14.427 ccw(c-15.906,13.63) Q4.S@-16.47,14.194 ; R44.1@-16.891,15.697 -16.703,15.509 Q4.S@-16.703,14.427 -15.85,14.427 v3(-15.443,14.834) ; v3@-15.621,14.834 cw(c-16.05,14.834) -15.747,14.53 cw(c-15.443,14.227) v3@-15.443,14.656
UART_RD1: Q4.D U1.39 | length 47.9
  Top Layer w0.2: v1@-14.326,10.722 cw(c-14.326,10.239) -13.984,10.581 cw(c-13.643,10.922) v1@-14.126,10.922 ; v1(-14.326,10.922) -10.82,7.417 10.312,7.417 13.94,3.789 13.94,-1.173 v1(13.818,-1.295) ccw(c13.521,-0.999) 13.94,-0.999 ; v1@13.676,-1.154 ccw(c13.038,-0.516) 13.94,-0.516
  Bottom Layer w0.2: Q4.D@-17.906,12.05 cw(c-18.515,11.44) -17.653,11.44 cw(c-16.791,11.44) Q4.D@-17.4,12.05 ; Q4.D@-17.653,12.395 -17.653,11.278 -17.297,10.922 v1(-14.326,10.922) ; v1@-14.467,10.781 ccw(c-14.808,10.439) -14.808,10.922 ccw(c-14.808,11.405) v1@-14.467,11.063 ; U1.39@11.956,-1.518 12.382,-1.944 13.169,-1.944 v1(13.818,-1.295) ; v1@13.618,-1.295 cw(c13.135,-1.295) 13.476,-1.637 cw(c13.818,-1.978) v1@13.818,-1.495
UART_TD: J3.4 Q3.S R41.1 | length 21.4
  Top Layer w0.254: v5@-19.648,0.695 ccw(c-19.952,0.998) -19.522,0.998 ccw(c-19.093,0.998) v5@-19.397,0.695 ; v5@-19.648,2.221 cw(c-19.952,1.918) -19.522,1.918 cw(c-19.093,1.918) v5@-19.397,2.221 ; v5(-19.522,0.569) v5(-19.522,2.347)
  Bottom Layer w0.254: R41.1@-20.054,11.188 cw(c-20.271,10.971) -19.964,10.971 cw(c-19.658,10.971) R41.1@-19.875,11.188 ; R41.1@-20.028,11.168 cw(c-20.192,10.883) -19.875,10.968 ; -19.964,10.284 ccw(c-19.123,10.284) Q3.S@-19.629,9.612 ; -19.964,10.793 ccw(c-18.738,10.793) Q3.S@-19.477,9.814 ; -19.883,10.998 cw(c-19.608,11.072) R41.1@-19.854,11.214 ; Q3.S@-19.756,9.52 cw(c-20.32,8.956) -19.522,8.956 cw(c-18.725,8.956) Q3.S@-19.289,9.52 ; v5@-19.648,2.473 ccw(c-19.952,2.776) -19.522,2.776 ccw(c-19.093,2.776) v5@-19.397,2.473 ; v5(-19.522,0.569) -19.453,0.5 J3.4@-17.899,0.5 ; v5(-19.522,2.347) Q3.S@-19.522,9.754 -19.964,10.196 R41.1@-19.964,11.303 ccw(c-18.354,11.303) Q3.S@-19.324,10.017 ; v5@-19.397,0.695 ccw(c-18.927,1.165) -18.927,0.5 ; J3.4@-18.497,0.378 ccw(c-18.792,0.082) -18.792,0.5 ccw(c-18.792,0.918) J3.4@-18.497,0.622
UART_TD1: Q3.D U1.40 | length 56.3
  Top Layer w0.2: v4(-20.396,6.452) -18.059,6.452 -17.577,6.934 -17.577,8.763 v4(-17.17,9.169) ; v4@-20.251,6.307 cw(c-19.902,5.957) -19.902,6.452 cw(c-19.902,6.946) v4@-20.251,6.596 ; v4@-17.375,9.169 cw(c-17.87,9.169) -17.52,8.82 cw(c-17.17,8.47) v4@-17.17,8.965 ; v4@-11.862,9.092 cw(c-11.862,8.597) -11.512,8.947 cw(c-11.163,9.296) v4@-11.657,9.296 ; v4(-11.862,9.296) -10.362,7.797 10.898,7.797 14.503,4.191 14.503,-1.854 ; v4(14.224,-2.261) 14.224,-2.134 14.503,-1.854 ; v4@14.419,-2.199 cw(c14.745,-2.096) 14.503,-1.854
  Bottom Layer w0.2: Q3.D@-20.725,7.376 cw(c-21.335,6.766) -20.472,6.766 cw(c-19.61,6.766) Q3.D@-20.22,7.376 ; v4@-20.541,6.596 ccw(c-20.707,6.762) -20.472,6.762 ; -20.472,7.13 ccw(c-19.718,7.13) v4@-20.251,6.596 ; Q3.D@-20.472,7.722 -20.472,6.528 v4(-20.396,6.452) ; v4@-17.145,9.271 -11.862,9.271 v4(-11.862,9.296) ; v4@-17.026,9.025 cw(c-16.431,8.43) -16.431,9.271 ; -12.418,9.271 ccw(c-12.418,9.852) v4@-12.007,9.441 ; -12.295,9.271 cw(c-12.295,8.863) v4@-12.007,9.152 ; U1.40@11.673,-1.801 12.34,-2.468 14.017,-2.468 v4(14.224,-2.261)
V6V: D3.2 J3.3 P1.2 Q5.D R12.1 R13.1 R14.1 R15.1 R16.1 R17.1 R20.1 R47.2 | length 58.3
  Top Layer w0.2: v1@4.445,8.563 cw(c4.445,8.208) 4.696,8.459 ; v1(4.445,8.763) 4.445,8.71 4.978,8.177 11.055,8.177 15.523,3.708 R13.1@15.621,3.708 ; v1@4.645,8.763 ccw(c5.255,8.763) 4.824,8.331 ; v1(6.274,-10.338) 6.579,-10.643 ; v1@6.29,-10.537 cw(c6.321,-10.9) 6.579,-10.643 ; v1@6.473,-10.354 ccw(c6.836,-10.385) 6.579,-10.643 ; R14.1@10.661,-10.751 ccw(c10.398,-11.014) 10.398,-10.643 ccw(c10.398,-10.271) R14.1@10.661,-10.534 ; R14.1@10.795,-10.643 6.579,-10.643 ; 15.209,4.022 ccw(c15.596,4.408) R13.1@15.596,3.862
  Top Layer w0.3: v2@-2.062,-12.4 cw(c-2.318,-12.656) -1.956,-12.656 cw(c-1.594,-12.656) v2@-1.85,-12.4 ; v2(-1.956,-12.294) -1.956,-14.453 R20.1@-1.067,-15.342 ; R20.1@-1.288,-15.121 ccw(c-1.067,-14.9) R20.1@-1.067,-15.212
  Bottom Layer w0.2: v1(-1.194,15.189) R47.2@-0.406,15.189 ; v1@-1.052,15.048 cw(c-0.711,14.706) -0.711,15.189 cw(c-0.711,15.672) v1@-1.052,15.331 ; R47.2@-0.515,15.08 ccw(c-0.778,14.817) -0.778,15.189 ccw(c-0.778,15.561) R47.2@-0.515,15.298 ; v1(1.626,-10.338) v1(6.274,-10.338) ; v1@1.767,-10.479 cw(c2.108,-10.821) 2.108,-10.338 cw(c2.108,-9.855) v1@1.767,-10.196 ; v1@6.132,-10.479 ccw(c5.791,-10.821) 5.791,-10.338 ccw(c5.791,-9.855) v1@6.132,-10.196
  Bottom Layer w0.3: J3.3@-17.899,-0.5 v2(-14.978,-0.5) ; J3.3@-17.318,-0.606 cw(c-17.062,-0.862) -17.062,-0.5 cw(c-17.062,-0.138) J3.3@-17.318,-0.394 ; v2@-15.084,-0.606 ccw(c-15.34,-0.862) -15.34,-0.5 ccw(c-15.34,-0.138) v2@-15.084,-0.394
  Bottom Layer w0.4: -13.005,-6.047 ccw(c-12.677,-6.047) v1@-12.909,-6.279 ; R16.1@-13.005,-5.613 -13.005,-6.325 v1(-12.979,-6.35) ; Q5.D@-10.856,-15.024 cw(c-11.136,-15.367) -10.693,-15.367 ; Q5.D@-10.829,-14.779 ccw(c-10.285,-14.964) -10.691,-15.369 ; -10.547,-15.513 ccw(c-9.804,-14.771) R15.1@-9.804,-15.821 ; Q5.D@-10.531,-15.024 ccw(c-10.251,-15.367) -10.693,-15.367 ; Q5.D@-10.512,-14.914 cw(c-10.072,-15.353) -10.072,-14.732 cw(c-10.072,-14.111) Q5.D@-10.512,-14.55 ; Q5.D@-10.45,-14.908 ccw(c-9.606,-15.194) -10.236,-15.824 ; R15.1@-10.057,-15.824 cw(c-10.057,-16.128) R15.1@-9.843,-15.913 ; R15.1@-9.84,-15.835 cw(c-10.033,-15.621) -10.236,-15.824 ; R15.1@-9.804,-15.9 -9.881,-15.824 -10.236,-15.824 ; -7.928,-15.389 ccw(c-7.671,-15.132) v1@-7.671,-15.496 ; v1@-7.696,-15.621 -8.585,-14.732 Q5.D@-10.693,-14.732 -10.693,-15.367 ; R17.1@-3.734,15.164 -1.219,15.164 v1(-1.194,15.189) ; -1.497,15.164 ccw(c-1.497,15.492) v1@-1.265,15.26 ; R12.1@12.344,11.608 13.31,11.608 v1(13.335,11.633) ; 13.032,11.608 ccw(c13.032,11.936) v1@13.264,11.704 ; -10.693,-15.367 -10.236,-15.824
  Bottom Layer w0.5: P1.2@4.521,21.777 4.605,21.693 D3.2@7.874,21.693 ; P1.2@4.769,21.53 cw(c5.163,21.135) 5.163,21.693 ; P1.2@4.769,22.025 ccw(c5.569,22.825) 5.569,21.693 ; D3.2@7.577,21.446 ccw(c6.979,20.848) 6.979,21.693 ccw(c6.979,22.538) D3.2@7.577,21.94
  other v1: -7.671,-15.596
VBAT: C2.1 C3.1 C6.1 D1.2 D2.2 Q5.S R2.1 R19.1 U3.3 | length 50.9
  Top Layer w0.2: v1(-8.077,-8.661) -6.604,-7.188 -1.016,-7.188 0.539,-5.633 v1(0.539,-5.456) ; v1@-8.077,-8.461 ccw(c-8.077,-7.979) -7.736,-8.32 ccw(c-7.394,-8.661) v1@-7.877,-8.661 ; 0.072,-6.1 ccw(c-0.573,-5.456) v1@0.339,-5.456 ; 0.413,-5.759 ccw(c0.11,-5.456) v1(0.539,-5.456) ; v1@0.557,-5.456 v1(0.539,-5.456)
  Bottom Layer w0.2: v1@0.557,-5.456 0.533,-5.479 0.533,-5.486 R19.1@1.194,-5.486 ; v1@0.68,-5.597 cw(c0.947,-5.864) R19.1@0.947,-5.486 ; v1@0.68,-5.314 ccw(c1.096,-4.898) R19.1@1.096,-5.486 ; v1@0.687,-5.59 cw(c0.871,-5.756) 0.935,-5.517 ; v1@0.712,-5.356 ccw(c1.002,-5.188) 0.915,-5.511 ; R19.1@1.085,-5.595 ccw(c0.822,-5.858) 0.822,-5.486 ccw(c0.822,-5.115) R19.1@1.085,-5.378
  Bottom Layer w0.4: C2.1@-11.393,-10.412 -11.051,-10.412 -10.541,-10.922 ; C2.1@-11.261,-10.471 ccw(c-10.301,-9.674) -10.301,-10.922 ; C2.1@-11.148,-10.718 cw(c-11.051,-11.431) -10.541,-10.922 ; C2.1@-10.953,-10.216 ccw(c-9.449,-8.967) C3.1@-9.449,-10.922 ; C2.1@-10.882,-10.412 ccw(c-10.475,-10.412) C2.1@-10.763,-10.7 ; -10.017,-11.741 cw(c-9.685,-11.646) -9.929,-11.402 ; Q5.S@-9.925,-12.518 ccw(c-10.364,-12.079) -9.743,-12.079 ccw(c-9.122,-12.079) Q5.S@-9.562,-12.518 ; v1@-9.743,-11.702 cw(c-8.694,-11.702) C3.1@-9.436,-10.96 ; -9.743,-11.321 cw(c-9.389,-11.321) C3.1@-9.463,-10.975 ; v1@-9.632,-11.631 cw(c-8.939,-11.432) C3.1@-9.449,-10.922 ; Q5.S@-9.562,-12.882 cw(c-8.509,-13.934) -8.509,-12.446 ; U3.3@-8.208,-9.935 cw(c-8.647,-10.375) -8.026,-10.375 cw(c-7.405,-10.375) U3.3@-7.845,-9.935 ; U3.3@-8.208,-9.572 ccw(c-8.647,-9.133) -8.026,-9.133 ccw(c-7.405,-9.133) U3.3@-7.845,-9.572 ; v1@-8.148,-8.732 cw(c-8.441,-9.025) -8.026,-9.025 ; v1(-8.077,-8.661) -8.026,-8.712 U3.3@-8.026,-9.754 -8.026,-10.643 -8.306,-10.922 C3.1@-9.449,-10.922 ; R2.1@-7.849,-12.446 -9.489,-12.446 Q5.S@-9.743,-12.7 -9.743,-11.217 C3.1@-9.449,-10.922 ; -10.541,-10.922 C3.1@-9.449,-10.922
  Bottom Layer w1: v1(-15.113,-16.561) -14.156,-15.604 D2.2@-14.156,-15.435 ; D2.2@-14.51,-15.081 ccw(c-16.116,-13.475) v1@-13.844,-13.475 ; D2.2@-14.085,-15.906 cw(c-14.085,-17.055) -13.272,-16.242 ; D1.2@-12.604,-17.311 ccw(c-13.569,-17.311) -12.887,-16.628 ccw(c-12.204,-15.945) D1.2@-12.204,-16.911 ; D1.2@-12.133,-17.382 -14.08,-15.435 D2.2@-14.156,-15.435 ; C2.1@-11.393,-10.412 -11.427,-10.379 C6.1@-13.844,-10.379 v1(-13.844,-13.386) -13.844,-15.123 D2.2@-14.156,-15.435
  other v1: -9.728,-11.659
VBUS: C20.1 D2.1 P2.1 RW1.1 | length 31.9
  Bottom Layer w0.2: P2.1@-25.041,0.45 -22.37,0.45 -21.946,0.025 -21.946,-5.588 C20.1@-21.057,-6.477 -20.803,-6.731 RW1.1@-20.803,-8.687 -21.514,-8.687 -21.742,-8.915 -21.742,-10.084 -19.22,-12.607 D2.1@-16.984,-12.607 ; P2.1@-24.415,0.393 cw(c-24.278,0.257) -24.278,0.45 cw(c-24.278,0.643) P2.1@-24.415,0.507 ; -21.654,-5.88 ccw(c-21.057,-5.282) C20.1@-21.057,-6.127 ; -21.533,-6 cw(c-21.96,-6.427) C20.1@-21.357,-6.427 ; C20.1@-21.269,-6.739 cw(c-22.394,-7.864) -20.803,-7.864 ; C20.1@-21.127,-6.598 cw(c-21.911,-7.382) -20.803,-7.382 ; C20.1@-20.986,-6.456 cw(c-21.428,-6.899) C20.1@-20.803,-6.899 ; RW1.1@-20.937,-8.796 ccw(c-21.2,-9.059) -21.2,-8.687 ccw(c-21.2,-8.315) RW1.1@-20.937,-8.578 ; RW1.1@-20.911,-8.578 ccw(c-21.174,-8.315) -20.803,-8.315 ccw(c-20.431,-8.315) RW1.1@-20.694,-8.578 ; -19.157,-12.607 ccw(c-19.157,-10.434) D2.1@-17.621,-11.97 ; -18.816,-12.607 cw(c-18.816,-14.297) D2.1@-17.621,-13.102 ; -18.674,-12.607 ccw(c-18.674,-10.917) D2.1@-17.479,-12.112 ; -18.333,-12.607 cw(c-18.333,-13.814) D2.1@-17.479,-12.96 ; D2.1@-18.192,-12.607 ccw(c-18.192,-11.399) D2.1@-17.338,-12.253
VDD: C28.2 C33.2 C35.2 C36.2 C44.2 L3.2 U1.1 U1.34 U1.47 | length 27.8
  Bottom Layer w0.2: v2@6.92,-6.564 ccw(c6.578,-6.223) 7.061,-6.223 ccw(c7.544,-6.223) v2@7.203,-6.564 ; v2(7.061,-6.706) 7.061,-5.423 U1.1@8.42,-4.063 ; v1@9.599,-5.722 ccw(c9.487,-5.537) 9.703,-5.537 ; U1.47@9.693,-3.781 10.262,-4.349 10.262,-4.978 9.703,-5.537 ; v1(9.703,-5.893) 9.703,-5.537 ; v1@9.807,-5.722 cw(c9.919,-5.537) 9.703,-5.537 ; U1.34@11.956,0.603 12.648,1.295 15.418,1.295 C35.2@15.443,1.27 C36.2@15.443,2.621 ; 12.816,1.295 ccw(c12.816,1.865) v2@13.219,1.462 ; 12.939,1.295 cw(c12.939,0.899) v2@13.219,1.179 ; v2@13.502,1.179 cw(c13.782,0.899) 13.782,1.295 ; v2@13.502,1.462 ccw(c13.905,1.865) 13.905,1.295 ; C35.2@15.334,1.187 ccw(c15.071,0.924) 15.071,1.295 ccw(c15.071,1.667) 15.334,1.404 ccw(c15.071,1.667) 15.443,1.667 ccw(c15.815,1.667) C35.2@15.552,1.404 ; C36.2@15.334,2.487 cw(c15.071,2.224) 15.443,2.224 cw(c15.815,2.224) C36.2@15.552,2.487
  Bottom Layer w0.254: v2@6.939,-6.828 cw(c6.644,-7.123) 7.061,-7.123 cw(c7.479,-7.123) v2@7.184,-6.828 ; C33.2@6.971,-7.454 ccw(c6.755,-7.237) 7.061,-7.237 ccw(c7.368,-7.237) C33.2@7.151,-7.454 ; C33.2@7.061,-7.544 v2(7.061,-6.706) ; L3.2@8.367,6.742 cw(c7.901,6.276) 8.56,6.276 cw(c9.219,6.276) L3.2@8.753,6.742 ; L3.2@8.367,7.228 ccw(c8.146,7.449) 8.458,7.449 ; C44.2@8.368,8.394 cw(c8.152,8.177) 8.458,8.177 cw(c8.765,8.177) C44.2@8.548,8.394 ; v2@8.437,4.796 ccw(c8.142,5.091) 8.56,5.091 ccw(c8.977,5.091) v2@8.682,4.796 ; 8.458,7.939 ccw(c9.464,7.939) L3.2@8.753,7.228 ; C44.2@8.458,8.509 8.458,7.087 L3.2@8.56,6.985 v2(8.56,4.674) ; v1@9.703,-6.066 cw(c9.703,-6.483) 9.998,-6.188 cw(c10.293,-5.893) v1@9.876,-5.893 ; v1(9.703,-5.893) 11.125,-7.315 C28.2@11.125,-7.442 ; 10.775,-6.965 cw(c10.298,-7.442) C28.2@10.973,-7.442
  other v2: 13.36,1.321
VDD3V3: Q2.D Q3.G Q4.G R41.2 R44.2 R53.1 | length 61.6
  Top Layer w0.3: v1(-16.104,17.17) -14.249,19.025 -12.09,19.025 -8.837,15.771 -6.303,15.771 -6.098,15.976 0.887,15.976 1.619,15.245 v1(4.743,15.245) 6.222,13.766 8.638,13.766 ; v1@-16.104,17.32 ccw(c-16.104,17.683) -15.848,17.426 ccw(c-15.591,17.17) v1@-15.954,17.17 ; v1@4.637,15.139 ccw(c4.381,14.883) 4.381,15.245 ccw(c4.381,15.607) v1@4.637,15.351 ; v1@4.743,15.095 cw(c4.743,14.733) 4.999,14.989 cw(c5.255,15.245) v1@4.893,15.245 ; 8.639,13.767 11.363,13.767 ; 11.364,13.766 12.601,13.766 13.965,12.402 13.965,11.181 v1(14.884,10.262) ; v1@14.734,10.262 ccw(c14.372,10.262) 14.628,10.518 ccw(c14.884,10.774) v1@14.884,10.412
  Bottom Layer w0.3: Q3.G@-21.64,9.971 ccw(c-22.164,10.495) -21.422,10.495 ccw(c-20.681,10.495) Q3.G@-21.205,9.971 ; Q3.G@-21.422,9.754 -21.422,10.861 R41.2@-20.98,11.303 -20.371,11.912 -20.346,11.912 -18.603,13.655 Q4.G@-18.603,14.427 -18.603,15.001 ; R41.2@-21.201,11.082 cw(c-20.98,10.861) R41.2@-20.98,11.174 ; R41.2@-20.98,11.432 ccw(c-20.98,11.745) R41.2@-20.76,11.524 ; Q4.G@-18.892,14.38 cw(c-18.335,14.471) Q4.G@-18.734,14.87 ; Q4.G@-18.82,14.21 cw(c-19.345,13.686) -18.603,13.686 cw(c-17.861,13.686) Q4.G@-18.386,14.21 ; Q4.G@-18.773,14.683 ccw(c-18.986,15.001) -18.603,15.001 ; Q4.G@-18.596,14.428 cw(c-17.625,14.588) -18.321,15.284 ; Q4.G@-18.433,14.683 cw(c-18.22,15.001) -18.603,15.001 ; Q4.G@-18.3,14.477 cw(c-16.914,14.704) R44.2@-17.907,15.697 ; R44.2@-18.128,15.476 cw(c-17.907,15.255) R44.2@-17.907,15.568 ; R44.2@-18.059,15.434 cw(c-17.804,15.287) R44.2@-17.88,15.571 ; R44.2@-17.803,15.723 cw(c-17.123,15.723) -17.604,16.204 ; v1@-16.21,17.064 ccw(c-16.466,16.808) -16.466,17.17 ccw(c-16.466,17.533) v1@-16.21,17.276 ; v1(-16.104,17.17) -16.637,17.17 -17.907,15.9 R44.2@-17.907,15.697 ; Q2.D@0.24,-16.676 cw(c-0.284,-17.201) 0.457,-17.201 cw(c1.199,-17.201) Q2.D@0.674,-16.676 ; v1@0.326,-17.852 ccw(c0.008,-17.534) 0.457,-17.534 ; v1(0.432,-17.958) 0.457,-17.932 Q2.D@0.457,-16.459 ; 0.457,-17.657 ccw(c0.733,-17.657) v1@0.538,-17.852 ; v1@4.648,15.215 4.679,15.245 v1(4.743,15.245) ; v1(14.884,10.262) R53.1@16.154,10.262 ; v1@14.99,10.156 cw(c15.247,9.899) 15.247,10.262 cw(c15.247,10.624) v1@14.99,10.368 ; -18.603,15.001 R44.2@-17.907,15.697
pads on no net: J3.7 J3.8 P2.2 P2.3 P2.4 P2.6 P2.7 P2.8 P2.9 U1.14 U1.22 U1.35 U1.36 U1.38 UB1. UB1.3 UB1.7 Y2.3

## Polygon pours and split planes (outlines as drawn)
GND on Bottom Layer "Top Layer-No Net" (solid, remove dead copper, pour order 4): -31.242,25.933 26.34,25.933 28.016,24.257 28.016,-23.774 25.705,-26.086 -28.626,-26.086 -31.242,-23.47
GND on Top Layer "Top Layer-No Net" (solid, remove dead copper, pour order 3): -31.246,25.933 26.335,25.933 28.012,24.257 28.012,-23.774 25.7,-26.086 -28.63,-26.086 -31.246,-23.47
VDD on POWER (split plane): 14.632,4.724 14.632,-5.153 12.164,-7.622 7.491,-7.622 7.426,-7.63 7.374,-7.652 6.678,-6.957 6.678,3.429 6.678,4.798 7.14,5.26 14.632,5.26
VDD3V3 on POWER (split plane): 7.698,14.678 7.698,5.764 7.036,5.764 6.971,5.755 6.91,5.73 6.857,5.69 6.248,5.081 6.208,5.028 6.183,4.967 6.174,4.902 6.174,4.623 6.174,3.429 6.174,-7.061 6.183,-7.126 6.208,-7.187 6.248,-7.24 7.061,-8.052 7.113,-8.092 7.174,-8.118 7.239,-8.126 7.239,-14.756 2.969,-19.026 -2.567,-19.026 -2.567,-16.335 0.654,-13.114 0.7,-13.095 0.714,-13.087 0.73,-13.081 0.758,-13.063 0.788,-13.048 0.801,-13.037 0.815,-13.028 1.024,-12.868 1.036,-12.856 1.05,-12.847 1.073,-12.822 1.097,-12.799 1.107,-12.786 1.118,-12.774 1.278,-12.565 1.287,-12.551 1.298,-12.538 1.314,-12.508 1.331,-12.48 1.337,-12.464 1.345,-12.449 1.364,-12.404 4.649,-9.119 4.689,-9.067 4.714,-9.006 4.723,-8.941 4.723,5.283 4.723,6.931 5.563,7.772 5.603,7.824 5.628,7.885 5.637,7.95 5.637,9.804 5.628,9.87 5.603,9.93 5.563,9.983 4.09,11.456 4.038,11.496 3.977,11.521 3.912,11.53 2.416,11.53 1.878,12.068 1.878,12.548 1.878,14.043 3.457,15.623 6.754,15.623
VBAT on POWER (split plane): -6.732,-13.36 -13.686,-20.314 -13.918,-20.164 -15.11,-19.287 -16.247,-18.339 -17.325,-17.325 -18.339,-16.247 -19.287,-15.11 -19.691,-14.561 -16.304,-11.174 -8.918,-11.174
V6V on POWER (split plane): 398 vertices, not listed, extent -23.304,-24.304 13.769,22.43
M3V3 on POWER (split plane): 368 vertices, not listed, extent -28.649,-24.501 26.322,24.501
GND on GND (split plane): 233 vertices, not listed, extent -28.649,-24.501 26.322,24.501

## Keep-outs
Keep-Out Layer:
  circle w0.127: c-5.763,20.828 r1.75
  circle w0.15: c0,11.75 r1
  circle w0.15: c0,-11.75 r1
  lines w0.127: -9.794,-5.15 ccw(c-8.794,-5.15) -8.794,-6.15 -1,-6.15 ccw(c-1,-5.15) 0,-5.15 0,5.15 ccw(c-1,5.15) -1,6.15 -8.794,6.15 ccw(c-8.794,5.15) -9.794,5.15 -9.794,-5.15
  lines w0.15: -24.931,-1.851 ccw(c0,0) 24.389,-5.495 ; -24.931,-1.85 -29.159,-1.85 -29.159,5.35 -24.42,5.35 ; -24.42,5.352 cw(c0,0) 24.82,2.998 ; 24.409,-5.5 26.833,-5.5 26.833,3 24.841,3

## Other copper
Top Layer:
  region net GND: 8.858,-2.877 11.328,-0.406 8.89,2.032 6.42,-0.439
Bottom Layer:
  pour cut-out: 25.603,6.909 27.991,4.521 27.991,-7.137 26.975,-8.153 22.25,-8.153 21.844,-7.747 21.844,6.147 22.606,6.909
POWER (plane layer: these items are gaps in the copper):
  lines w0.5: -23.952,-7.29 -19.152,-7.29 -16.967,-5.105 -16.967,1.549 -15.011,1.549 -12.014,-1.448 -12.014,-8.992 -11.532,-9.474 0,-9.474 2.26,-7.214 2.26,5.157 2.26,5.436 -3.683,11.379 -3.683,16.535 -3.683,22.628 ; -20.041,-15.164 -20.041,-14.554 -16.408,-10.922 -8.814,-10.922 -6.426,-13.31 ; -13.894,-20.904 -13.894,-20.879 -6.375,-13.36 ; -3.683,22.682 5.283,22.682 9.373,18.593 10.795,18.593 14.021,15.367 14.021,8.28 13.284,7.544 9.017,7.544 8.103,7.544 8.001,7.645 ; -3.251,-25.019 -3.048,-24.816 -2.819,-24.587 -2.819,-16.231 ; -2.819,-16.256 -2.819,-16.231 ; -2.743,-19.279 3.073,-19.279 7.491,-14.861 7.491,-7.874 9.627,-7.874 12.116,-7.874 12.268,-7.874 14.884,-5.258 14.884,4.724 14.884,5.512 7.036,5.512 6.426,4.902 ; 1.626,12.548 1.626,11.963 ; 6.426,4.623 6.426,4.902 ; 7.239,-7.874 6.426,-7.061 6.426,3.429 6.426,4.902 ; 7.95,5.512 7.95,14.783 6.858,15.875 3.353,15.875 1.626,14.148 1.626,11.963 ; -2.819,-16.231 4.47,-8.941 4.47,5.283 4.47,7.036 5.385,7.95 5.385,9.804 3.912,11.278 2.311,11.278 1.626,11.963

## Silkscreen, mask and mechanical layers (free items; w line width, h text height)
Top Overlay:
  circle w0.127: c-17.319,10 r1.5
  circle w0.127: c-9.999,17.321 r1.5
  circle w0.127: c0.001,20 r1.5
  circle w0.127: c10.001,17.321 r1.5
  circle w0.127: c17.322,10 r1.5
  circle w0.127: c20.001,0 r1.5
  circle w0.127: c17.322,-10 r1.5
  circle w0.127: c10.001,-17.32 r1.5
  circle w0.127: c0.001,-20 r1.5
  circle w0.127: c-9.999,-17.32 r1.5
  circle w0.127: c-17.319,-10 r1.5
  circle w0.127: c-19.999,0 r1.5
  circle w0.15: c0,0 r9.5
  circle w0.15: c0,0.026 r13.5
  text "JYD_DL-5" at 1.168,-0.61 h1.4
  text "2020-12-30" at 0.864,-2.54 h1.5
  text "M3V3" at 25.603,-4.623 h0.8 r70
Bottom Overlay:
  lines w0.15: -17.501,17.856 -13.233,13.589 ; -13.231,13.586 cw(c0.025,-0.025) -0.708,18.96 ; -0.711,18.96 -0.711,25.019 ; 0.178,-25.044 0.178,-18.999 ccw(c0,0) 13.736,-13.127 ; 13.564,-13.233 17.755,-17.424